# EAGLE board Adafruit Bluefruit LE USB Friend Original (EAGLE 6.6.0)
REV: H
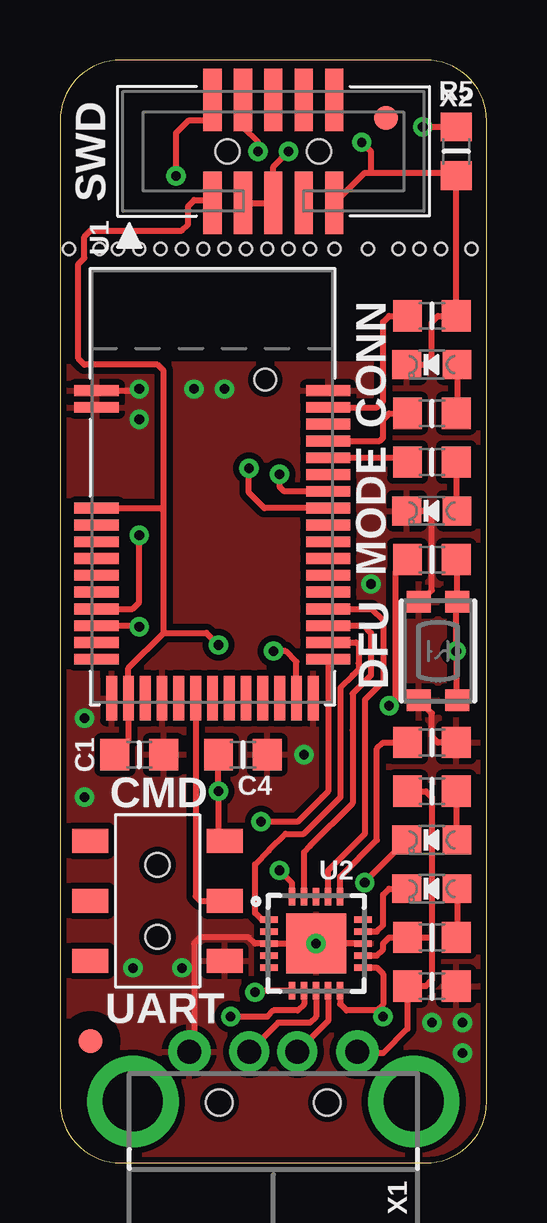
[diagram p0: board, top side]
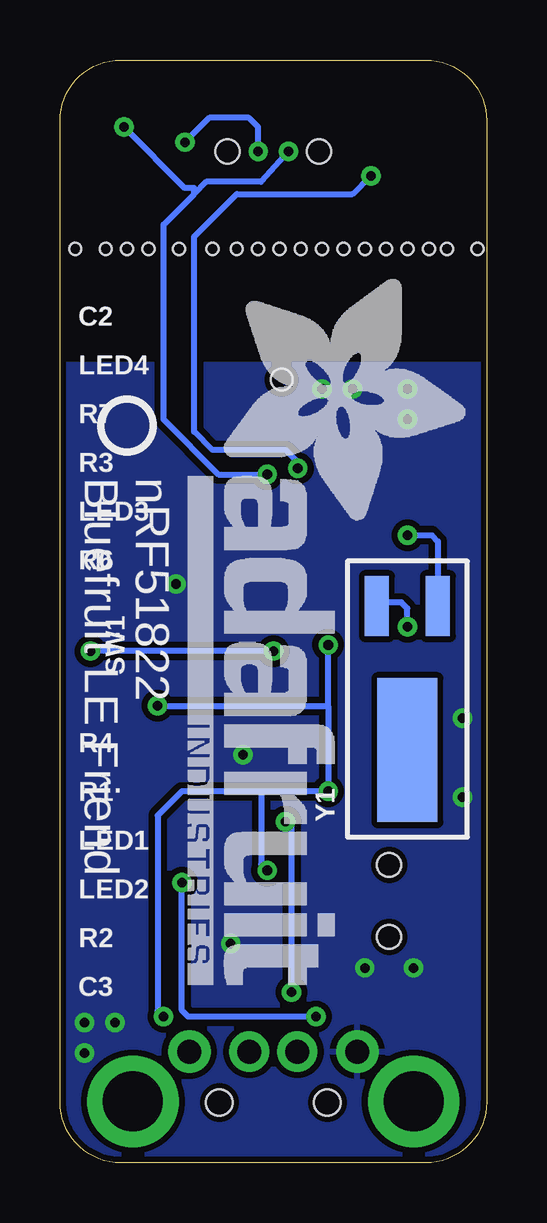
[diagram p1: board, bottom side, seen from below]

Size 17.78 x 45.97 mm. Coordinates in mm from the lower left corner, seen from the top.
Outline: 0,43.43 0,2.54 arc90 2.54,0 15.24,0 arc90 17.78,2.54 17.78,43.43 arc90 15.24,45.97 2.54,45.97 arc90 0,43.43
Copper layers (1*16): Top 0.035mm / dielectric 1.5mm / Bottom 0.035mm
Design rules "adafruit": minimum track width 8mil, minimum drill 15.5mil, track to track 8mil, track to pad 8mil, pad to pad 8mil, via to via 8mil, smd to smd 8mil, copper to edge 10mil, drill to drill 8mil, minimum pad ring 10mil, minimum via ring 8mil, stop-mask expansion 2mil, vias tented up to drill 20mil, thermal gap 10mil
Holes 0.5 mm at 17.14,38.1 15.88,38.1 14.99,38.1 14.1,38.1 12.83,38.1 11.43,38.1 10.41,38.1 9.53,38.1 8.64,38.1 7.75,38.1 6.86,38.1 0.38,38.1 1.65,38.1 2.41,38.1 3.3,38.1 4.19,38.1 5.08,38.1 5.97,38.1

## Footprints (pad centres in the part's own frame; a part is rotated, then mirrored left to right if it is on the bottom)
_0805MP = smd 1.2 x 1.3: 1 -1.016,0; 2 1.016,0
FIDUCIAL_1MM = smd 1 x 1: 1 0,0
CHIPLED_0805_NOOUTLINE = smd 1.2 x 1.2: A 0,-1.05; C 0,1.05
BTN_KMR2_4.6X2.8 = smd 0.9 x 1: A 2.05,0.8; A' -2.05,0.8; B 2.05,-0.8; B' -2.05,-0.8
EG1390 = smd 1 x 1.5: O1 -2.5,2.8; O2 -2.5,-2.8; P1 0,2.8; P2 0,-2.8; S1 2.5,2.8; S2 2.5,-2.8 | hole 1: 1.5,0; -1.5,0
BLE_MODULE_RAYTAC_MDBT40 = smd 1.85 x 0.45: 1 -4.825,4; 2 -4.825,3.3; 3 -4.825,-0.9; 4 -4.825,-1.6; 5 -4.825,-2.3; 6 -4.825,-3; 7 -4.825,-3.7; 8 -4.825,-4.4; 9 -4.825,-5.1; 10 -4.825,-5.8; 11 -4.825,-6.5; 12 -4.825,-7.2; 26 4.825,-7.2; 27 4.825,-6.5; 28 4.825,-5.8; 29 4.825,-5.1; 30 4.825,-4.4; 31 4.825,-3.7; 32 4.825,-3; 33 4.825,-2.3; 34 4.825,-1.6; 35 4.825,-0.9; 36 4.825,-0.2; 37 4.825,0.5; 38 4.825,1.2; 39 4.825,1.9; 40 4.825,2.6; 41 4.825,3.3; 42 4.825,4 | smd 0.45 x 1.85: 13 -4.2,-8.825; 14 -3.5,-8.825; 15 -2.8,-8.825; 16 -2.1,-8.825; 17 -1.4,-8.825; 18 -0.7,-8.825; 19 0,-8.825; 20 0.7,-8.825; 21 1.4,-8.825; 22 2.1,-8.825; 23 2.8,-8.825; 24 3.5,-8.825; 25 4.2,-8.825 | hole 0.9: 2.2,4.45
QFN20_4MM = smd 0.73 x 0.28: P$1 -1.965,1; P$2 -1.965,0.5; P$3 -1.965,0; P$4 -1.965,-0.5; P$5 -1.965,-1; P$11 1.965,-1; P$12 1.965,-0.5; P$13 1.965,0; P$14 1.965,0.5; P$15 1.965,1 | smd 0.28 x 0.73: P$6 -1,-1.965; P$7 -0.5,-1.965; P$8 0,-1.965; P$9 0.5,-1.965; P$10 1,-1.965; P$16 1,1.965; P$17 0.5,1.965; P$18 0,1.965; P$19 -0.5,1.965; P$20 -1,1.965 | smd 2.5 x 2.5: P$21 0,0
USB_A-THM = drill 1 pad 1.676: D+ 1,-2.1; D- -1,-2.1 | drill 1 pad 1.778: GND 3.5,-2.1; VBUS -3.5,-2.1 | drill 2.5 pad 3.81: MNT1 -5.85,-0.02; MNT2 5.85,-0.02 | hole 1.1: -2.25,0.022; 2.25,0.022
2X05_1.27MM_BOX_POSTS = smd 0.76 x 2.6: 1 -2.54,-2.15; 2 -2.54,2.15; 3 -1.27,-2.15; 4 -1.27,2.15; 5 0,-2.15; 6 0,2.15; 7 1.27,-2.15; 8 1.27,2.15; 9 2.54,-2.15; 10 2.54,2.15 | hole 1: -1.905,0; 1.905,0
CRYSTAL_CYL_2X6MM_SMT = smd 2.5 x 1: 1 2.125,1.27; 2 2.125,-1.27 | smd 6 x 2.5: CYLINDER -3.875,0

## Placement (x,y rotation side)
C1  1uF  [_0805MP]  3.3,17.02 0 top
C2  1uF  [_0805MP]  15.49,35.31 0 top
C3  10uF  [_0805MP]  15.49,7.37 0 top
C4  10uF  [_0805MP]  7.62,17.02 0 top
FID1  FIDUCIAL""  [FIDUCIAL_1MM]  13.59,43.56 0 top
FID2  FIDUCIAL""  [FIDUCIAL_1MM]  1.27,5.08 0 top
LED1  YELLOW  [CHIPLED_0805_NOOUTLINE]  15.49,13.46 90 top
LED2  GREEN  [CHIPLED_0805_NOOUTLINE]  15.49,11.43 90 top
LED3  RED  [CHIPLED_0805_NOOUTLINE]  15.49,27.18 90 top
LED4  BLUE  [CHIPLED_0805_NOOUTLINE]  15.49,33.27 90 top
R1  1K  [_0805MP]  15.49,15.49 0 top
R2  1K  [_0805MP]  15.49,9.4 0 top
R3  1K  [_0805MP]  15.49,29.21 180 top
R4  0  [_0805MP]  15.49,17.53 0 top
R5  10K  [_0805MP]  16.51,42.16 270 top
R6  10K  [_0805MP]  15.49,25.15 0 top
R7  1K  [_0805MP]  15.49,31.24 180 top
SW1  KMR2  [BTN_KMR2_4.6X2.8]  15.75,21.34 270 top
SW2  KMR2  [EG1390]  4.06,10.92 270 top
U1  nrf51822_32KB  [BLE_MODULE_RAYTAC_MDBT40]  6.35,28.19 0 top
U2  FT231XQ-x  [QFN20_4MM]  10.67,9.14 0 top
U$22  [ADAFRUIT_TEXT_30MM]  12.45,37.08 270 bottom
U$27  [PCBFEAT-REV-056]  14.99,30.73 270 bottom
X1  USB A  [USB_A-THM]  8.89,2.54 180 top
X2  20317  [2X05_1.27MM_BOX_POSTS]  8.89,42.16 0 top
Y1  DNC  [CRYSTAL_CYL_2X6MM_SMT]  3.3,21.08 90 bottom

## Library data of the parts
C1-C4 LED1-LED4 R1-R7 SW1 U1 U2 U$22 U$27 X1 X2 Y1 = microbuilder
FID1 FID2 = microbuilder; BOM: EXCLUDE
SW2 = adafruit

## Nets
3.3V: C1.1 C4.1 R6.1 SW2.O1 U1.3 U1.14 U2.P$10 U2.P$11 U2.P$20 X2.1
5.0V: C3.1 R1.1 R2.1 U2.P$12 X1.VBUS
BOOTLOADER: R6.2 SW1.A SW1.A' U1.24
CTS: U1.28 U2.P$19
DCC: U1.15
GND: C1.2 C2.2 C3.2 C4.2 LED3.C LED4.C R4.2 R5.2 SW1.B SW1.B' SW2.S1 U1.1 U1.2 U1.13 U1.16 U1.25 U1.42 U2.P$3 U2.P$13 U2.P$21 X1.GND X2.3 X2.5 X2.9
MODE: SW2.P1 U1.18
N$1: LED2.A R2.2
N$2: C2.1 U1.41
N$3: LED3.A R3.1
N$4: LED1.A R1.2
N$5: LED1.C U2.P$7
N$6: LED2.C U2.P$14
N$7: R4.1 U2.P$16
N$8: U2.P$8 X1.D+
N$9: U2.P$9 X1.D-
N$10: R3.2 U1.38
N$11: R7.2 U1.39
N$12: LED4.A R7.1
N$13: U1.9 Y1.2
N$14: U1.10 Y1.1
RTS: U1.26 U2.P$6
RXD: U1.29 U2.P$17
SWCLK: R5.1 U1.36 X2.4
SWDIO: U1.35 X2.2
TXD: U1.27 U2.P$1

## Tracks (layer width: path | path; a pad name or v marks a point on that pad's centre or on a via)
3.3V  (via drill 0.4)
  Top 0.254: R6.1 13.97,24.64 13.97,19.3 v13.72,19.05 | C4.1 v6.6,15.49 6.6,13.43 SW2.O1 | C1.1 2.85,17.58 U1.14 2.85,20.63 4.32,22.1 | U1.3 4.2,27.29 4.32,27.18 | 4.32,27.18 4.32,33.02 4.06,33.27 1.02,33.27 0.76,33.53 0.76,37.47 1.02,37.72 1.02,38.61 1.27,38.86 5.08,38.86 5.33,39.12 5.33,39.88 5.59,40.13 6.23,40.13 X2.1 | U2.P$11 13.19,8.14 13.46,7.87 13.46,6.6 13.21,6.35 | 13.21,6.35 11.94,6.35 11.67,6.62 U2.P$10 | 13.21,6.35 v13.46,6.1 | U2.P$20 9.67,11.67 v9.14,12.19 | 4.32,22.1 4.32,27.18 | 4.32,22.1 6.1,22.1 v6.6,21.59
  Bottom 0.254: v13.72,19.05 6.6,19.05 | 9.4,15.49 v6.6,15.49 6.6,19.05 | 9.4,15.49 12.7,15.49 13.72,14.48 13.72,6.35 v13.46,6.1 | 9.4,15.49 9.4,12.45 v9.14,12.19 | 6.6,19.05 v6.6,21.59
5.0V
  Top 0.254: R1.1 15.24,15.49 15.49,15.24 15.49,9.4 | 15.49,9.4 15.49,7.62 15.24,7.37 C3.1 14.48,5.59 13.46,4.57 12.46,4.57 X1.VBUS | 15.49,9.4 R2.1 13.72,9.4 13.46,9.14 13.46,8.89 13.22,8.64 U2.P$12
BOOTLOADER  (via drill 0.4)
  Top 0.254: U1.24 9.85,20.88 9.4,21.34 v8.89,21.34 | SW1.A 16.51,19.32 v16.51,21.34 16.51,23.35 SW1.A' 16.55,25.11 R6.2
  Bottom 0.254: v8.89,21.34 v16.51,21.34
CTS
  Top 0.254: U1.28 12.66,22.39 12.95,22.1 12.95,20.83 12.95,20.32 12.19,19.56 12.19,18.03 12.19,14.99 10.41,13.21 10.17,12.96 U2.P$19
GND  (via drill 0.39, 0.4)
  Top 0.254: U1.1 3.24,32.19 v3.3,32.26 | SW1.B' 15,23.39 15.49,23.88 15.49,26.92 15.24,27.18 LED3.C | R4.2 15.75,17.53 15.49,17.78 15.49,18.74 SW1.B | 5.33,4.83 5.59,5.08 5.59,9.14 5.84,9.4 7.87,9.4 8.13,9.14 U2.P$3 U2.P$21 U2.P$13 | LED4.C 15.24,33.27 15.49,33.53 15.49,35.05 15.75,35.31 C2.2 R5.2 16.64,41.27 | X2.3 X2.5 8.89,41.53 v9.53,42.16 | X2.9 12.69,41.27 12.95,41.27 | 12.95,41.27 16.64,41.27 | v12.57,42.55 12.95,42.16 12.95,41.27 | 16.64,41.27 16.76,41.27
  Bottom 0.254: v3.3,32.26 3.3,32 | v9.53,42.16 9.53,43.18 9.91,43.56 11.56,43.56 v12.57,42.55
  other vias: 3.3,30.99 5.59,32.26 6.86,32.26 12.95,24.13 15.49,5.84 16.76,5.84 16.76,4.57 10.67,9.14 10.16,17.02 1.02,18.54 1.02,15.24 3.05,8.13 5.08,8.13
  pour Bottom (isolate 0.254): 0,0 17.78,0 17.78,33.27 0,33.27
  pour Top (isolate 0.254): 0,0 17.78,0 17.78,33.27 0,33.27
MODE
  Top 0.254: U1.18 5.65,11.11 5.84,10.92 SW2.P1
N$1
  Top 0.254: LED2.A 16.54,9.43 R2.2
N$2
  Top 0.254: U1.41 13.21,31.49 13.46,31.75 13.46,35.05 13.72,35.31 C2.1
N$3
  Top 0.254: R3.1 16.51,27.21 LED3.A
N$4
  Top 0.254: R1.2 16.51,13.5 LED1.A
N$5  (via drill 0.4)
  Top 0.254: v12.7,11.68 12.7,11.72 LED1.C | U2.P$7 10.17,6.61 9.91,6.35 8.89,6.35 8.64,6.1 v7.11,6.1
  Bottom 0.254: 12.7,11.43 v12.7,11.68 12.7,6.35 12.45,6.1 v7.11,6.1
N$6
  Top 0.254: U2.P$14 13.2,9.64 13.46,9.91 13.46,11.18 13.72,11.43 LED2.C
N$7
  Top 0.254: U2.P$16 11.67,11.92 13.21,13.46 13.21,17.27 13.46,17.53 R4.1
N$8
  Top 0.254: U2.P$8 10.67,6.1 10.41,5.84 9.09,5.84 X1.D+
N$9
  Top 0.254: U2.P$9 11.17,5.92 X1.D-
N$10
  Top 0.254: U1.38 14.29,29.39 R3.2
N$11
  Top 0.254: U1.39 13.33,30.09 13.46,30.23 13.46,30.99 13.72,31.24 R7.2
N$12
  Top 0.254: LED4.A 16.54,31.28 R7.1
N$13  (via drill 0.4)
  Top 0.254: U1.9 3.03,23.09 3.3,23.37 v3.3,26.16
  Bottom 0.254: v3.3,26.16 2.29,26.16 2.03,25.91 Y1.2
N$14  (via drill 0.4)
  Top 0.254: U1.10 3.01,22.39 v3.3,22.35
  Bottom 0.254: v3.3,22.35 3.3,23.11 3.56,23.37 4.16,23.37 Y1.1
RTS  (via drill 0.4)
  Top 0.254: U1.26 11.18,15.49 10.92,15.24 9.91,14.22 v8.38,14.22 | U2.P$6 8.2,7.18 v8.13,7.11
  Bottom 0.254: v8.13,7.11 8.13,12.95 8.13,13.97 v8.38,14.22
RXD
  Top 0.254: U1.29 12.97,23.09 13.46,22.61 13.46,20.83 13.46,20.07 12.7,19.3 12.7,18.03 12.7,13.72 11.18,12.19 11.17,12.18 U2.P$17
SWCLK  (via drill 0.4)
  Top 0.254: X2.4 7.62,43.18 8.26,42.55 v8.26,42.16 | v9.14,28.7 9.14,28.19 9.34,27.99 U1.36 | R5.1 15.24,43.18 v15.11,43.18
  Bottom 0.254: v8.26,42.16 9.4,40.89 11.68,40.89 12.19,40.39 | v9.14,28.7 11.18,28.7 13.46,30.99 13.46,39.12 12.19,40.39 | 12.19,40.39 12.19,40.64 12.57,40.64 v15.11,43.18
SWDIO  (via drill 0.4)
  Top 0.254: U1.35 8.52,27.29 7.87,27.94 v7.87,28.96 | X2.2 6.35,43.43 5.33,43.43 4.83,42.93 v4.83,41.15
  Bottom 0.254: v7.87,28.96 7.87,29.21 8.38,29.72 11.43,29.72 12.19,30.48 12.19,38.61 10.41,40.39 5.59,40.39 v4.83,41.15
TXD
  Top 0.254: U1.27 12.34,21.69 12.45,21.59 12.45,20.83 12.45,20.57 12.19,20.32 11.68,19.81 11.68,18.03 11.68,15.24 10.16,13.72 9.4,13.72 8.7,13.02 8.13,12.45 8.13,10.41 8.4,10.14 U2.P$1

## Text on the board
tPlace: SWD | CONN | MODE | DFU | CMD | UART
bPlace: nRF51822 / Bluefruit LE Friend
Document: Designed for USB-7201-C (Digikey 377-1735-ND)